# EAGLE board Room Temp-Air analyzer (EAGLE 9.7.0)

Size 288.27 x 172.87 mm. Coordinates in mm from the lower left corner, seen from the top.
Outline: 0,0 288.27,0 288.27,172.87 0,172.87 0,0
Copper layers (1*16): Top 0.035mm / dielectric 1.5mm / Bottom 0.035mm
Design rules "default": minimum track width 6mil, minimum drill 0.35mm, track to track 6mil, track to pad 6mil, pad to pad 6mil, via to via 6mil, smd to smd 6mil, copper to edge 40mil, drill to drill 6mil, minimum pad ring 10mil, minimum via ring 8mil, stop-mask expansion 4mil, vias tented up to drill 0mil, thermal gap 10mil

## Footprints (pad centres in the part's own frame; a part is rotated, then mirrored left to right if it is on the bottom)
BATTERY-GENERIC = drill 1.118 pad 3.15 octagon: + 2.54,0; - -2.54,0
LEDRD254W60D565H860B_O = drill 0.981 pad 1.581: 1 -1.27,0; 2 1.27,0
MQ-XX-SOCKET = drill 1.27: 1 -6.223,6.223; 2 -8.788,0; 3 -6.223,-6.223; 4 6.223,-6.223; 5 8.788,0; 6 6.223,6.223
PIEZO = drill 1 pad 1.6: 1 -3.5,0; 2 3.5,0
RESAD1016W63L850D250B = drill 0.83 pad 1.43: 1 -5.08,0; 2 5.08,0
HA-06-SM065 = drill 1 pad 1.676: 1 -2.54,-2.54; 2 0,2.54; 3 2.54,-2.54
TO220V = drill 1.016 long: 1 -2.54,-2.54; 2 0,-2.54; 3 2.54,-2.54
TO92 = drill 0.813 octagon: 1 -1.27,0; 2 0,1.905; 3 1.27,0
JHD-162A = drill 1.016 long: 1 -19.05,0; 2 -16.51,0; 3 -13.97,0; 4 -11.43,0; 5 -8.89,0; 6 -6.35,0; 7 -3.81,0; 8 -1.27,0; 9 1.27,0; 10 3.81,0; 11 6.35,0; 12 8.89,0; 13 11.43,0; 14 13.97,0; 15 16.51,0; 16 19.05,0
ARDUINO-UNO-R3-SHIELD = drill 1.016 pad 1.88: 3.3V 24.13,-2.54; 5V 24.13,0; A0 24.13,12.7; A1 24.13,15.24; A2 24.13,17.78; A3 24.13,20.32; A4 24.13,22.86; A5 24.13,25.4; AREF -24.13,-13.97; D2 -24.13,20.32; D3 -24.13,17.78; D4 -24.13,15.24; D5 -24.13,12.7; D6 -24.13,10.16; D7 -24.13,7.62; D8 -24.13,3.81; D9 -24.13,1.27; D10 -24.13,-1.27; D11 -24.13,-3.81; D12 -24.13,-6.35; D13 -24.13,-8.89; GND@0 24.13,2.54; GND@1 24.13,5.08; GND@2 -24.13,-11.43; IOREF 24.13,-7.62; NC 24.13,-10.16; RES 24.13,-5.08; RX -24.13,25.4; SCL -24.13,-19.05; SDA -24.13,-16.51; TX -24.13,22.86; VIN 24.13,7.62

## Placement (x,y rotation side)
BAT1  9V  [BATTERY-GENERIC]  8.26,23.48 180 top
D4  ORANGE  [LEDRD254W60D565H860B_O]  268.92,159.29 0 top
GAS3  GAS-SENSORMQ-XX-SOCKET  [MQ-XX-SOCKET]  222.89,34.29 270 top
PIEZOALARM_PIEZO  PIEZO  [PIEZO]  276.54,159.29 0 top
R1  200  [RESAD1016W63L850D250B]  262.57,159.29 0 top
R2  22k  [RESAD1016W63L850D250B]  102.94,8.8 30 top
RPOTPOT10  10k  [HA-06-SM065]  197.05,122.62 0 top
RR220  220  [RESAD1016W63L850D250B]  227.53,117.55 90 top
U1  LM7805_TO220V  [TO220V]  102.26,36.74 0 top
U4  TMP36GT9Z_TO92  [TO92]  171.65,130.25 0 top
ULCD  LCD-16X2JHD-162A  [JHD-162A]  211.02,102.43 0 top
UUNO1  ARDUINO-UNO-R3-SHIELD  [ARDUINO-UNO-R3-SHIELD]  99.36,126.71 270 top

## Library data of the parts
BAT1 GAS3 PIEZOALARM_PIEZO R1 R2 RPOTPOT10 RR220 U1 U4 ULCD UUNO1 = Tinkercad
D4 = Tinkercad; CATEGORY: Opto-Electronic; SUB-CATEGORY: LED; VALUE: LED_ORANGE

## Nets
BAT1+: BAT1.+ U1.1
BAT1-: BAT1.- GAS3.5 PIEZOALARM_PIEZO.2 R2.1 RPOTPOT10.1 U1.2 U4.1 ULCD.1 ULCD.5 ULCD.16 UUNO1.GND@0 UUNO1.GND@1 UUNO1.GND@2
D4_A: D4.1 R1.2
GAS3_A: GAS3.1 GAS3.2 GAS3.3 U1.3
PIEZOALARM_PIEZO_1: D4.2 PIEZOALARM_PIEZO.1
ULCD_LED+: RR220.1 ULCD.15
ULCD_VO: RPOTPOT10.2 ULCD.3
UUNO1_5V: RPOTPOT10.3 RR220.2 U4.3 ULCD.2 UUNO1.5V
UUNO1_A0: U4.2 UUNO1.A0
UUNO1_A1: GAS3.4 GAS3.6 R2.2 UUNO1.A1
UUNO1_D2: ULCD.14 UUNO1.D2
UUNO1_D3: ULCD.13 UUNO1.D3
UUNO1_D4: ULCD.12 UUNO1.D4
UUNO1_D5: ULCD.11 UUNO1.D5
UUNO1_D7: R1.1 UUNO1.D7
UUNO1_D11: ULCD.6 UUNO1.D11
UUNO1_D12: ULCD.4 UUNO1.D12

## Tracks (layer width: path | path; a pad name or v marks a point on that pad's centre or on a via)
BAT1+  (1 unrouted)
BAT1-  (12 unrouted)
D4_A  (1 unrouted)
GAS3_A  (3 unrouted)
PIEZOALARM_PIEZO_1  (1 unrouted)
ULCD_LED+  (1 unrouted)
ULCD_VO  (1 unrouted)
UUNO1_5V  (4 unrouted)
UUNO1_A0  (1 unrouted)
UUNO1_A1  (3 unrouted)
UUNO1_D2  (1 unrouted)
UUNO1_D3  (1 unrouted)
UUNO1_D4  (1 unrouted)
UUNO1_D5  (1 unrouted)
UUNO1_D7  (1 unrouted)
UUNO1_D11  (1 unrouted)
UUNO1_D12  (1 unrouted)